# Altium PCB DDR3.PcbDoc
Units mm, origin at the board's own origin, x right, y up, seen from the top; angles counter-clockwise.
Board outline 67.6 x 30 mm, 2 copper layers (F.Cu, B.Cu); 1 components, 0 nets, 206 pads, 0 vias.
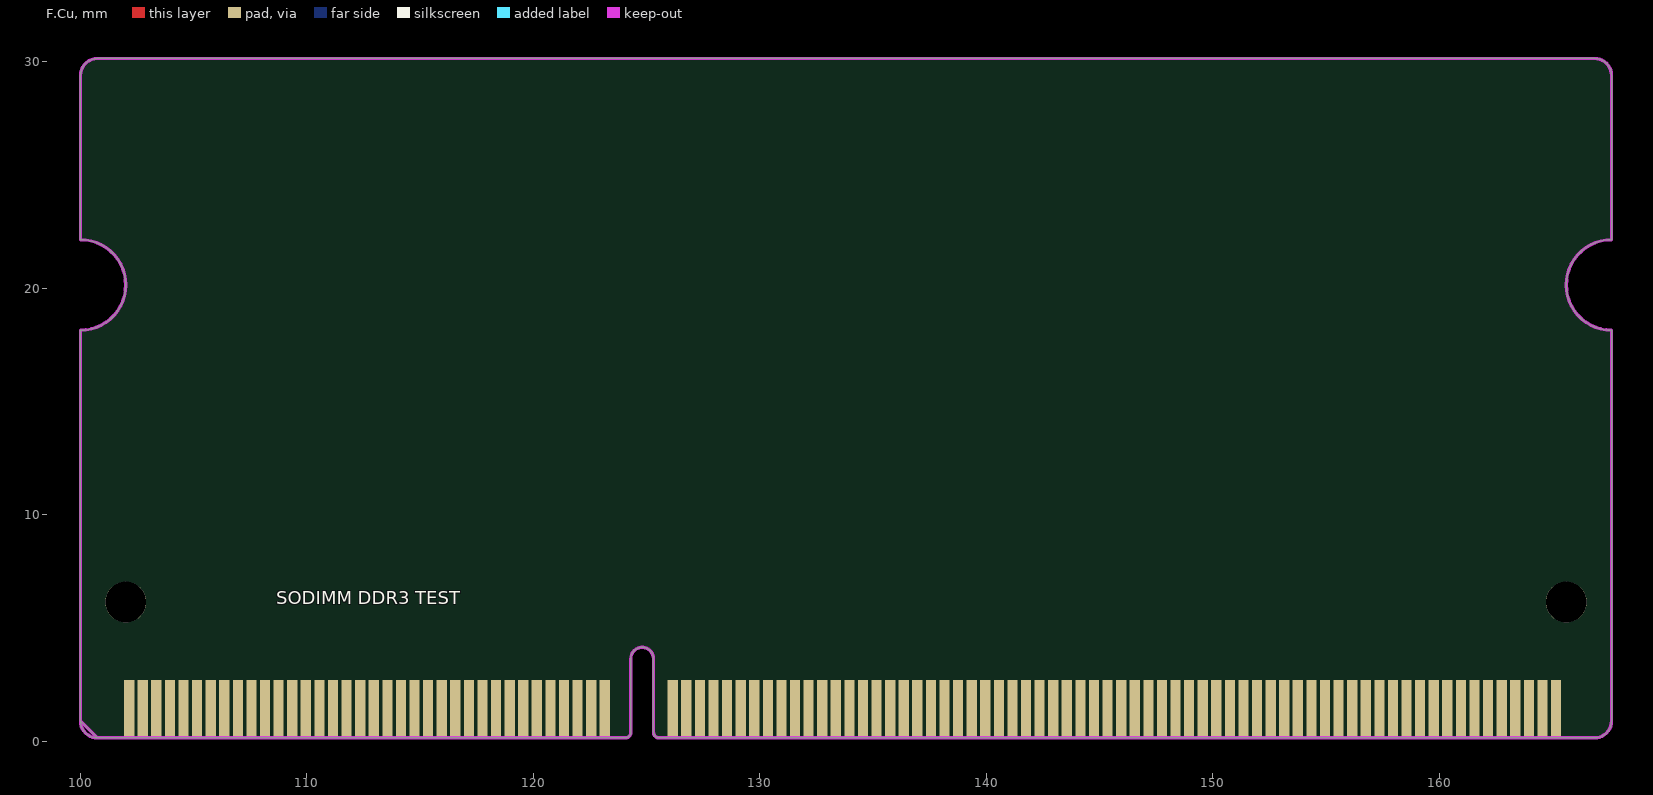
[diagram p0: F.Cu view]
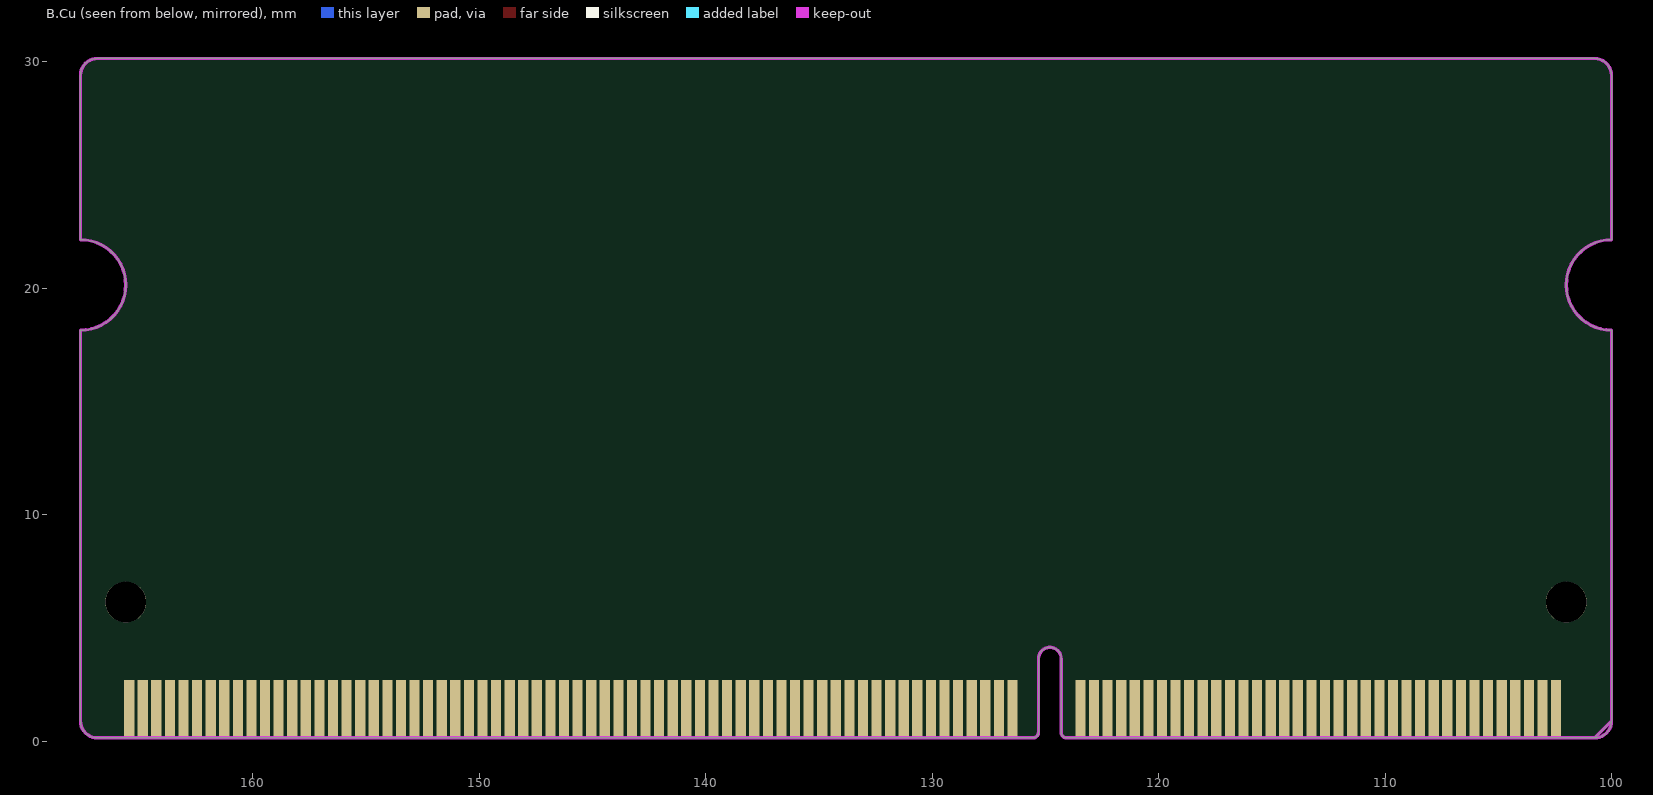
[diagram p1: B.Cu view, seen from below]

## Layer stack, top to bottom
F.Mask: solder mask 0.0102, Solder Resist, Dk 3.5
F.Cu: signal copper 0.0356
Dielectric 1: dielectric 0.32, FR-4, Dk 4.8
B.Cu: signal copper 0.0356
B.Mask: solder mask 0.0102, Solder Resist, Dk 3.5

## Board outline
100,0.9 ccw(c100.75,0.9) 100.75,0.15 124.05,0.15 ccw(c124.05,0.4) 124.3,0.4 124.3,3.65 cw(c124.8,3.65) 125.3,3.65 125.3,0.4 ccw(c125.55,0.4) 125.55,0.15 166.85,0.15 ccw(c166.85,0.9) 167.6,0.9 167.6,18.15 cw(c167.6,20.15) 167.6,22.15 167.6,29.4 ccw(c166.85,29.4) 166.85,30.15 100.749,30.15 ccw(c100.75,29.4) 100,22.15 cw(c100,20.15) 100,18.15 100,0.9 ccw(c100.75,0.9) 100,0.9

## Design rules (kind name [scope] priority, off if disabled: settings)
Clearance "Clearence 0.2_NetClass" [InNetClass('Default')] p1: gap=0.2 ignorepadtopadclearanceinfootprint=FALSE
MinimumSolderMaskSliver [All] p1: minsoldermaskwidth=0
PolygonConnect [All] p1: connectstyle=Direct reliefconductorwidth=0.254 reliefentries=4 polygonreliefangle="90 Angle" airgapwidth=0.254
RoutingVias [All] p1: holewidth=0.711 width=1.27 viastyle="Through Hole" minholewidth=0.711 minwidth=1.27 maxholewidth=0.711 maxwidth=1.27
SilkToSilkClearance [All] p1: silktosilkclearance=0
SilkToSolderMaskClearance [IsPad] p1: minsilkscreentomaskgap=0 clearancetoexposedcopper=TRUE
SolderMaskExpansion [All] p1: expansion=0.102 istentingtop=FALSE
Width [All] p1: maxlimit=0.254 minlimit=0.254 preferedwidth=0.254
27 further rules are at their usual default settings.

## Components (designator, comment, footprint, x,y, rotation, side; value= is the part's Value field where it differs from the comment)
"SODIMM DDR3 TEST" "SODIMM DDR3 EDGE" SODIMM_DDR3_EDGE 100,0.15 r0 top

## Footprints (in the part's own frame and the unit in brackets; to place one, negate y for a bottom-side part, rotate by r counter-clockwise, add the part's x,y. Pads: shape width x height; smd on the part's side, far side on the other; paste and mask are expansions set on the pad)
SODIMM_DDR3_EDGE [mm]
  rect 0.45x2.5 smd paste-2.5 mask+0: 1(2.15,1.3) 3(2.75,1.3) 5(3.35,1.3) 7(3.95,1.3) 9(4.55,1.3) 11(5.15,1.3) 13(5.75,1.3) 15(6.35,1.3) 17(6.95,1.3) 19(7.55,1.3) 21(8.15,1.3) 23(8.75,1.3) 25(9.35,1.3) 27(9.95,1.3) 29(10.55,1.3) 31(11.15,1.3) 33(11.75,1.3) 35(12.35,1.3) 37(12.95,1.3) 39(13.55,1.3) 41(14.15,1.3) 43(14.75,1.3) 45(15.35,1.3) 47(15.95,1.3) 49(16.55,1.3) 51(17.15,1.3) 53(17.75,1.3) 55(18.35,1.3) 57(18.95,1.3) 59(19.55,1.3) 61(20.15,1.3) 63(20.75,1.3) 65(21.35,1.3) 67(21.95,1.3) 69(22.55,1.3) 71(23.15,1.3) 73(26.15,1.3) 75(26.75,1.3) 77(27.35,1.3) 79(27.95,1.3) 81(28.55,1.3) 83(29.15,1.3) 85(29.75,1.3) 87(30.35,1.3) 89(30.95,1.3) 91(31.55,1.3) 93(32.15,1.3) 95(32.75,1.3) 97(33.35,1.3) 99(33.95,1.3) 101(34.55,1.3) 103(35.15,1.3) 105(35.75,1.3) 107(36.35,1.3) 109(36.95,1.3) 111(37.55,1.3) 113(38.15,1.3) 115(38.75,1.3) 117(39.35,1.3) 119(39.95,1.3) 121(40.55,1.3) 123(41.15,1.3) 125(41.75,1.3) 127(42.35,1.3) 129(42.95,1.3) 131(43.55,1.3) 133(44.15,1.3) 135(44.75,1.3) 137(45.35,1.3) 139(45.95,1.3) 141(46.55,1.3) 143(47.15,1.3) 145(47.75,1.3) 147(48.35,1.3) 149(48.95,1.3) 151(49.55,1.3) 153(50.15,1.3) 155(50.75,1.3) 157(51.35,1.3) 159(51.95,1.3) 161(52.55,1.3) 163(53.15,1.3) 165(53.75,1.3) 167(54.35,1.3) 169(54.95,1.3) 171(55.55,1.3) 173(56.15,1.3) 175(56.75,1.3) 177(57.35,1.3) 179(57.95,1.3) 181(58.55,1.3) 183(59.15,1.3) 185(59.75,1.3) 187(60.35,1.3) 189(60.95,1.3) 191(61.55,1.3) 193(62.15,1.3) 195(62.75,1.3) 197(63.35,1.3) 199(63.95,1.3) 201(64.55,1.3) 203(65.15,1.3)
  rect 0.45x2.5 smd far side paste-2.5 mask+0: 2(2.45,1.3) 4(3.05,1.3) 6(3.65,1.3) 8(4.25,1.3) 10(4.85,1.3) 12(5.45,1.3) 14(6.05,1.3) 16(6.65,1.3) 18(7.25,1.3) 20(7.85,1.3) 22(8.45,1.3) 24(9.05,1.3) 26(9.65,1.3) 28(10.25,1.3) 30(10.85,1.3) 32(11.45,1.3) 34(12.05,1.3) 36(12.65,1.3) 38(13.25,1.3) 40(13.85,1.3) 42(14.45,1.3) 44(15.05,1.3) 46(15.65,1.3) 48(16.25,1.3) 50(16.85,1.3) 52(17.45,1.3) 54(18.05,1.3) 56(18.65,1.3) 58(19.25,1.3) 60(19.85,1.3) 62(20.45,1.3) 64(21.05,1.3) 66(21.65,1.3) 68(22.25,1.3) 70(22.85,1.3) 72(23.45,1.3) 74(26.45,1.3) 76(27.05,1.3) 78(27.65,1.3) 80(28.25,1.3) 82(28.85,1.3) 84(29.45,1.3) 86(30.05,1.3) 88(30.65,1.3) 90(31.25,1.3) 92(31.85,1.3) 94(32.45,1.3) 96(33.05,1.3) 98(33.65,1.3) 100(34.25,1.3) 102(34.85,1.3) 104(35.45,1.3) 106(36.05,1.3) 108(36.65,1.3) 110(37.25,1.3) 112(37.85,1.3) 114(38.45,1.3) 116(39.05,1.3) 118(39.65,1.3) 120(40.25,1.3) 122(40.85,1.3) 124(41.45,1.3) 126(42.05,1.3) 128(42.65,1.3) 130(43.25,1.3) 132(43.85,1.3) 134(44.45,1.3) 136(45.05,1.3) 138(45.65,1.3) 140(46.25,1.3) 142(46.85,1.3) 144(47.45,1.3) 146(48.05,1.3) 148(48.65,1.3) 150(49.25,1.3) 152(49.85,1.3) 154(50.45,1.3) 156(51.05,1.3) 158(51.65,1.3) 160(52.25,1.3) 162(52.85,1.3) 164(53.45,1.3) 166(54.05,1.3) 168(54.65,1.3) 170(55.25,1.3) 172(55.85,1.3) 174(56.45,1.3) 176(57.05,1.3) 178(57.65,1.3) 180(58.25,1.3) 182(58.85,1.3) 184(59.45,1.3) 186(60.05,1.3) 188(60.65,1.3) 190(61.25,1.3) 192(61.85,1.3) 194(62.45,1.3) 196(63.05,1.3) 198(63.65,1.3) 200(64.25,1.3) 202(64.85,1.3) 204(65.45,1.3)
  round 1.8 hole 1.8 paste-2539.97: Un1(2,6) Un2(65.6,6)

## Part data
"SODIMM DDR3 TEST": library part SODIMM_DDR3_EDGE

## Nets (pads, with @x,y where several pads share a name; then routed paths per layer and width w, separated by ;. In a path a pad name is that pad's centre, name@x,y a point inside that pad or via, vN(x,y) a via of type N, cw(c..) or ccw(c..) an arc to the next point about the centre after c; other vN are vias at no path point)
pads on no net: "SODIMM DDR3 TEST.1" "SODIMM DDR3 TEST.2" "SODIMM DDR3 TEST.3" "SODIMM DDR3 TEST.4" "SODIMM DDR3 TEST.5" "SODIMM DDR3 TEST.6" "SODIMM DDR3 TEST.7" "SODIMM DDR3 TEST.8" "SODIMM DDR3 TEST.9" "SODIMM DDR3 TEST.10" "SODIMM DDR3 TEST.11" "SODIMM DDR3 TEST.12" "SODIMM DDR3 TEST.13" "SODIMM DDR3 TEST.14" "SODIMM DDR3 TEST.15" "SODIMM DDR3 TEST.16" "SODIMM DDR3 TEST.17" "SODIMM DDR3 TEST.18" "SODIMM DDR3 TEST.19" "SODIMM DDR3 TEST.20" "SODIMM DDR3 TEST.21" "SODIMM DDR3 TEST.22" "SODIMM DDR3 TEST.23" "SODIMM DDR3 TEST.24" "SODIMM DDR3 TEST.25" "SODIMM DDR3 TEST.26" "SODIMM DDR3 TEST.27" "SODIMM DDR3 TEST.28" "SODIMM DDR3 TEST.29" "SODIMM DDR3 TEST.30" "SODIMM DDR3 TEST.31" "SODIMM DDR3 TEST.32" "SODIMM DDR3 TEST.33" "SODIMM DDR3 TEST.34" "SODIMM DDR3 TEST.35" "SODIMM DDR3 TEST.36" "SODIMM DDR3 TEST.37" "SODIMM DDR3 TEST.38" "SODIMM DDR3 TEST.39" "SODIMM DDR3 TEST.40" "SODIMM DDR3 TEST.41" "SODIMM DDR3 TEST.42" "SODIMM DDR3 TEST.43" "SODIMM DDR3 TEST.44" "SODIMM DDR3 TEST.45" "SODIMM DDR3 TEST.46" "SODIMM DDR3 TEST.47" "SODIMM DDR3 TEST.48" "SODIMM DDR3 TEST.49" "SODIMM DDR3 TEST.50" "SODIMM DDR3 TEST.51" "SODIMM DDR3 TEST.52" "SODIMM DDR3 TEST.53" "SODIMM DDR3 TEST.54" "SODIMM DDR3 TEST.55" "SODIMM DDR3 TEST.56" "SODIMM DDR3 TEST.57" "SODIMM DDR3 TEST.58" "SODIMM DDR3 TEST.59" "SODIMM DDR3 TEST.60" "SODIMM DDR3 TEST.61" "SODIMM DDR3 TEST.62" "SODIMM DDR3 TEST.63" "SODIMM DDR3 TEST.64" "SODIMM DDR3 TEST.65" "SODIMM DDR3 TEST.66" "SODIMM DDR3 TEST.67" "SODIMM DDR3 TEST.68" "SODIMM DDR3 TEST.69" "SODIMM DDR3 TEST.70" "SODIMM DDR3 TEST.71" "SODIMM DDR3 TEST.72" "SODIMM DDR3 TEST.73" "SODIMM DDR3 TEST.74" "SODIMM DDR3 TEST.75" "SODIMM DDR3 TEST.76" "SODIMM DDR3 TEST.77" "SODIMM DDR3 TEST.78" "SODIMM DDR3 TEST.79" "SODIMM DDR3 TEST.80" "SODIMM DDR3 TEST.81" "SODIMM DDR3 TEST.82" "SODIMM DDR3 TEST.83" "SODIMM DDR3 TEST.84" "SODIMM DDR3 TEST.85" "SODIMM DDR3 TEST.86" "SODIMM DDR3 TEST.87" "SODIMM DDR3 TEST.88" "SODIMM DDR3 TEST.89" "SODIMM DDR3 TEST.90" "SODIMM DDR3 TEST.91" "SODIMM DDR3 TEST.92" "SODIMM DDR3 TEST.93" "SODIMM DDR3 TEST.94" "SODIMM DDR3 TEST.95" "SODIMM DDR3 TEST.96" "SODIMM DDR3 TEST.97" "SODIMM DDR3 TEST.98" "SODIMM DDR3 TEST.99" "SODIMM DDR3 TEST.100" "SODIMM DDR3 TEST.101" "SODIMM DDR3 TEST.102" "SODIMM DDR3 TEST.103" "SODIMM DDR3 TEST.104" "SODIMM DDR3 TEST.105" "SODIMM DDR3 TEST.106" "SODIMM DDR3 TEST.107" "SODIMM DDR3 TEST.108" "SODIMM DDR3 TEST.109" "SODIMM DDR3 TEST.110" "SODIMM DDR3 TEST.111" "SODIMM DDR3 TEST.112" "SODIMM DDR3 TEST.113" "SODIMM DDR3 TEST.114" "SODIMM DDR3 TEST.115" "SODIMM DDR3 TEST.116" "SODIMM DDR3 TEST.117" "SODIMM DDR3 TEST.118" "SODIMM DDR3 TEST.119" "SODIMM DDR3 TEST.120" "SODIMM DDR3 TEST.121" "SODIMM DDR3 TEST.122" "SODIMM DDR3 TEST.123" "SODIMM DDR3 TEST.124" "SODIMM DDR3 TEST.125" "SODIMM DDR3 TEST.126" "SODIMM DDR3 TEST.127" "SODIMM DDR3 TEST.128" "SODIMM DDR3 TEST.129" "SODIMM DDR3 TEST.130" "SODIMM DDR3 TEST.131" "SODIMM DDR3 TEST.132" "SODIMM DDR3 TEST.133" "SODIMM DDR3 TEST.134" "SODIMM DDR3 TEST.135" "SODIMM DDR3 TEST.136" "SODIMM DDR3 TEST.137" "SODIMM DDR3 TEST.138" "SODIMM DDR3 TEST.139" "SODIMM DDR3 TEST.140" "SODIMM DDR3 TEST.141" "SODIMM DDR3 TEST.142" "SODIMM DDR3 TEST.143" "SODIMM DDR3 TEST.144" "SODIMM DDR3 TEST.145" "SODIMM DDR3 TEST.146" "SODIMM DDR3 TEST.147" "SODIMM DDR3 TEST.148" "SODIMM DDR3 TEST.149" "SODIMM DDR3 TEST.150" "SODIMM DDR3 TEST.151" "SODIMM DDR3 TEST.152" "SODIMM DDR3 TEST.153" "SODIMM DDR3 TEST.154" "SODIMM DDR3 TEST.155" "SODIMM DDR3 TEST.156" "SODIMM DDR3 TEST.157" "SODIMM DDR3 TEST.158" "SODIMM DDR3 TEST.159" "SODIMM DDR3 TEST.160" "SODIMM DDR3 TEST.161" "SODIMM DDR3 TEST.162" "SODIMM DDR3 TEST.163" "SODIMM DDR3 TEST.164" "SODIMM DDR3 TEST.165" "SODIMM DDR3 TEST.166" "SODIMM DDR3 TEST.167" "SODIMM DDR3 TEST.168" "SODIMM DDR3 TEST.169" "SODIMM DDR3 TEST.170" "SODIMM DDR3 TEST.171" "SODIMM DDR3 TEST.172" "SODIMM DDR3 TEST.173" "SODIMM DDR3 TEST.174" "SODIMM DDR3 TEST.175" "SODIMM DDR3 TEST.176" "SODIMM DDR3 TEST.177" "SODIMM DDR3 TEST.178" "SODIMM DDR3 TEST.179" "SODIMM DDR3 TEST.180" "SODIMM DDR3 TEST.181" "SODIMM DDR3 TEST.182" "SODIMM DDR3 TEST.183" "SODIMM DDR3 TEST.184" "SODIMM DDR3 TEST.185" "SODIMM DDR3 TEST.186" "SODIMM DDR3 TEST.187" "SODIMM DDR3 TEST.188" "SODIMM DDR3 TEST.189" "SODIMM DDR3 TEST.190" "SODIMM DDR3 TEST.191" "SODIMM DDR3 TEST.192" "SODIMM DDR3 TEST.193" "SODIMM DDR3 TEST.194" "SODIMM DDR3 TEST.195" "SODIMM DDR3 TEST.196" "SODIMM DDR3 TEST.197" "SODIMM DDR3 TEST.198" "SODIMM DDR3 TEST.199" "SODIMM DDR3 TEST.200" "SODIMM DDR3 TEST.201" "SODIMM DDR3 TEST.202" "SODIMM DDR3 TEST.203" "SODIMM DDR3 TEST.204" "SODIMM DDR3 TEST.Un1" "SODIMM DDR3 TEST.Un2"

## Keep-outs
Edge.Cuts:
  lines w0.15: 100,0.9 ccw(c100.75,0.9) 100.75,0.15 ; 100,0.9 ccw(c100.75,0.9) 100.75,0.15 ; 100,0.9 ccw(c100.75,0.9) 100.75,0.15 ; 100,0.9 ccw(c100.75,0.9) 100.75,0.15 ; 100,0.9 100,18.15 ; 100,0.9 100.75,0.15 ; 100,0.9 100,18.15 ; 100,18.15 ccw(c100,20.15) 100,22.15 ; 100,18.15 ccw(c100,20.15) 100,22.15 ; 100,22.15 100,29.4 ; 100,22.15 100,29.4 ; 100,29.4 cw(c100.75,29.4) 100.749,30.15 ; 100,29.4 cw(c100.75,29.4) 100.749,30.15 ; 100.749,30.15 166.85,30.15 ; 100.749,30.15 166.85,30.15 ; 100.75,0.15 124.05,0.15 ; 100.75,0.15 124.05,0.15 ; 124.05,0.15 ccw(c124.05,0.4) 124.3,0.4 ; 124.05,0.15 ccw(c124.05,0.4) 124.3,0.4 ; 124.3,0.4 124.3,3.65 ; 124.3,0.4 124.3,3.65 ; 124.3,3.65 cw(c124.8,3.65) 125.3,3.65 ; 124.3,3.65 cw(c124.8,3.65) 125.3,3.65 ; 125.3,0.4 ccw(c125.55,0.4) 125.55,0.15 ; 125.3,0.4 ccw(c125.55,0.4) 125.55,0.15 ; 125.3,0.4 125.3,3.65 ; 125.3,0.4 125.3,3.65 ; 125.55,0.15 166.85,0.15 ; 125.55,0.15 166.85,0.15 ; 166.85,0.15 ccw(c166.85,0.9) 167.6,0.9 ; 166.85,0.15 ccw(c166.85,0.9) 167.6,0.9 ; 166.85,30.15 cw(c166.85,29.4) 167.6,29.4 ; 166.85,30.15 cw(c166.85,29.4) 167.6,29.4 ; 167.6,0.9 167.6,18.15 ; 167.6,0.9 167.6,18.15 ; 167.6,18.15 cw(c167.6,20.15) 167.6,22.15 ; 167.6,18.15 cw(c167.6,20.15) 167.6,22.15 ; 167.6,22.15 167.6,29.4 ; 167.6,22.15 167.6,29.4

## Silkscreen, mask and mechanical layers (free items; w line width, h text height)
F.Mask:
  dashed: 126,0 123,0 123,2.9 126,2.9
B.Mask:
  dashed: 126.5,0 123.5,0 123.5,2.9 126.5,2.9